# Altium PCB PCB1.PcbDoc (part 1 of 2)
Units mil, origin at the board's own origin, x right, y up, seen from the top; angles counter-clockwise.
Board outline 2954.24 x 1620.63 mil, 4 copper layers (Signal+GND, Signal, PWR, GND), stack 63.303 mil thick; 109 components, 81 nets, 322 pads, 116 vias.
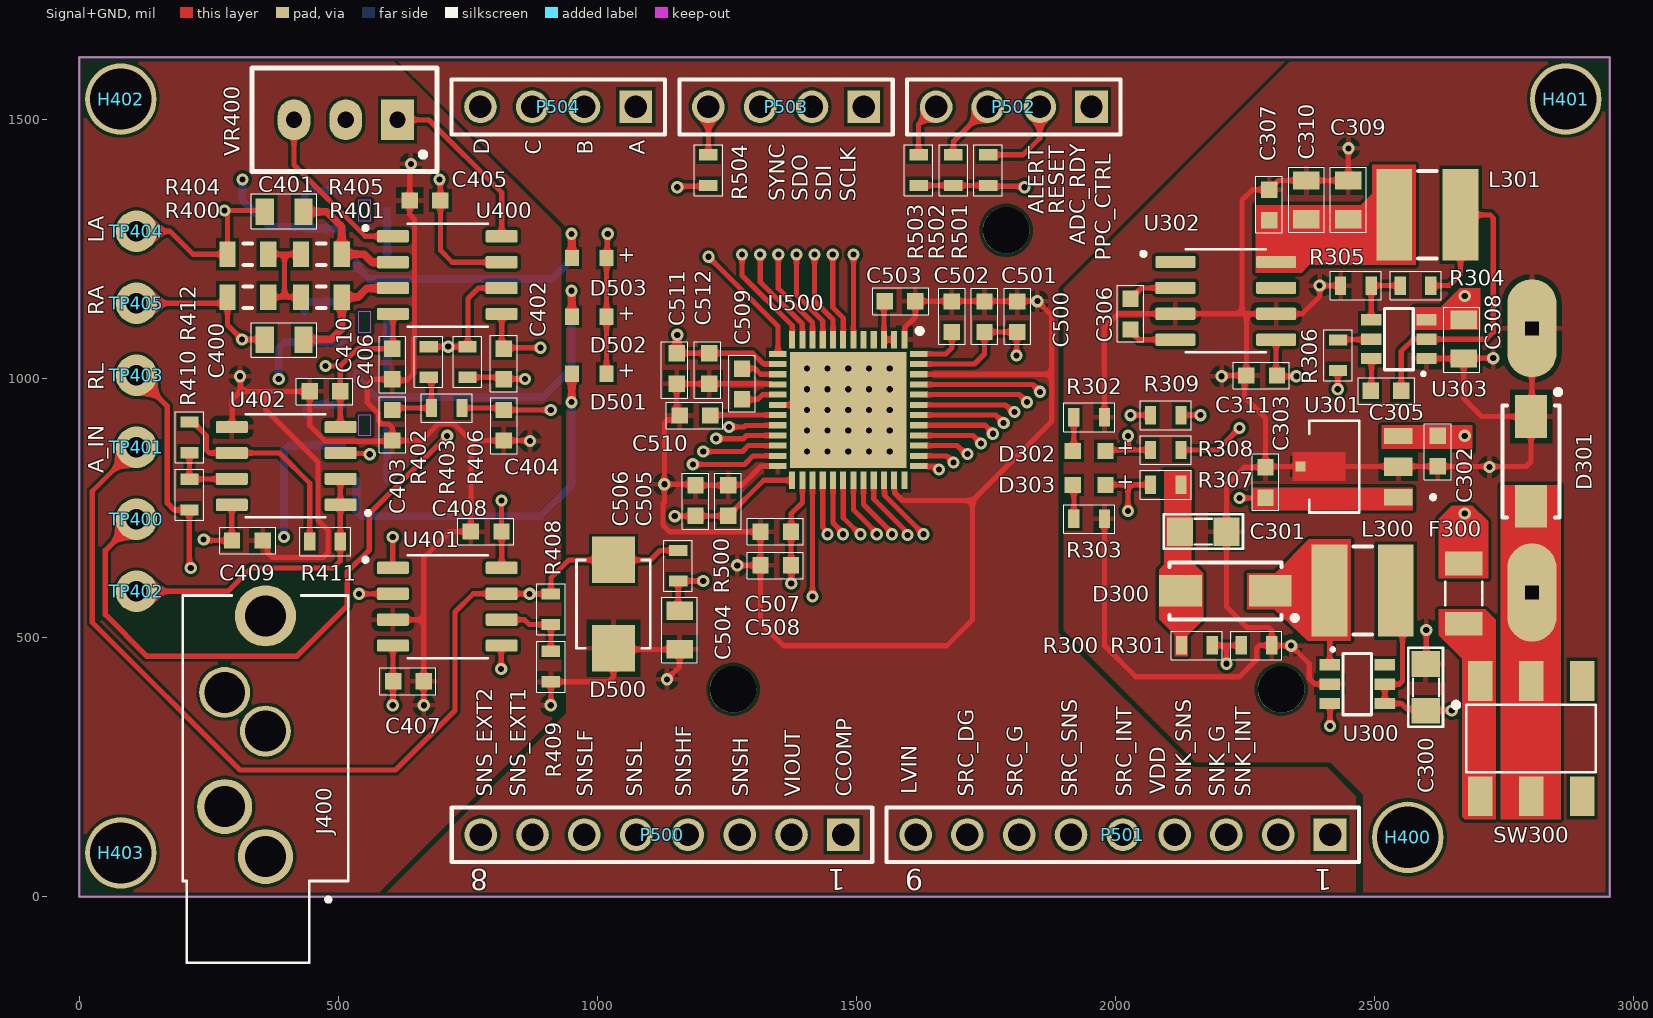
[diagram p0: Signal+GND view]
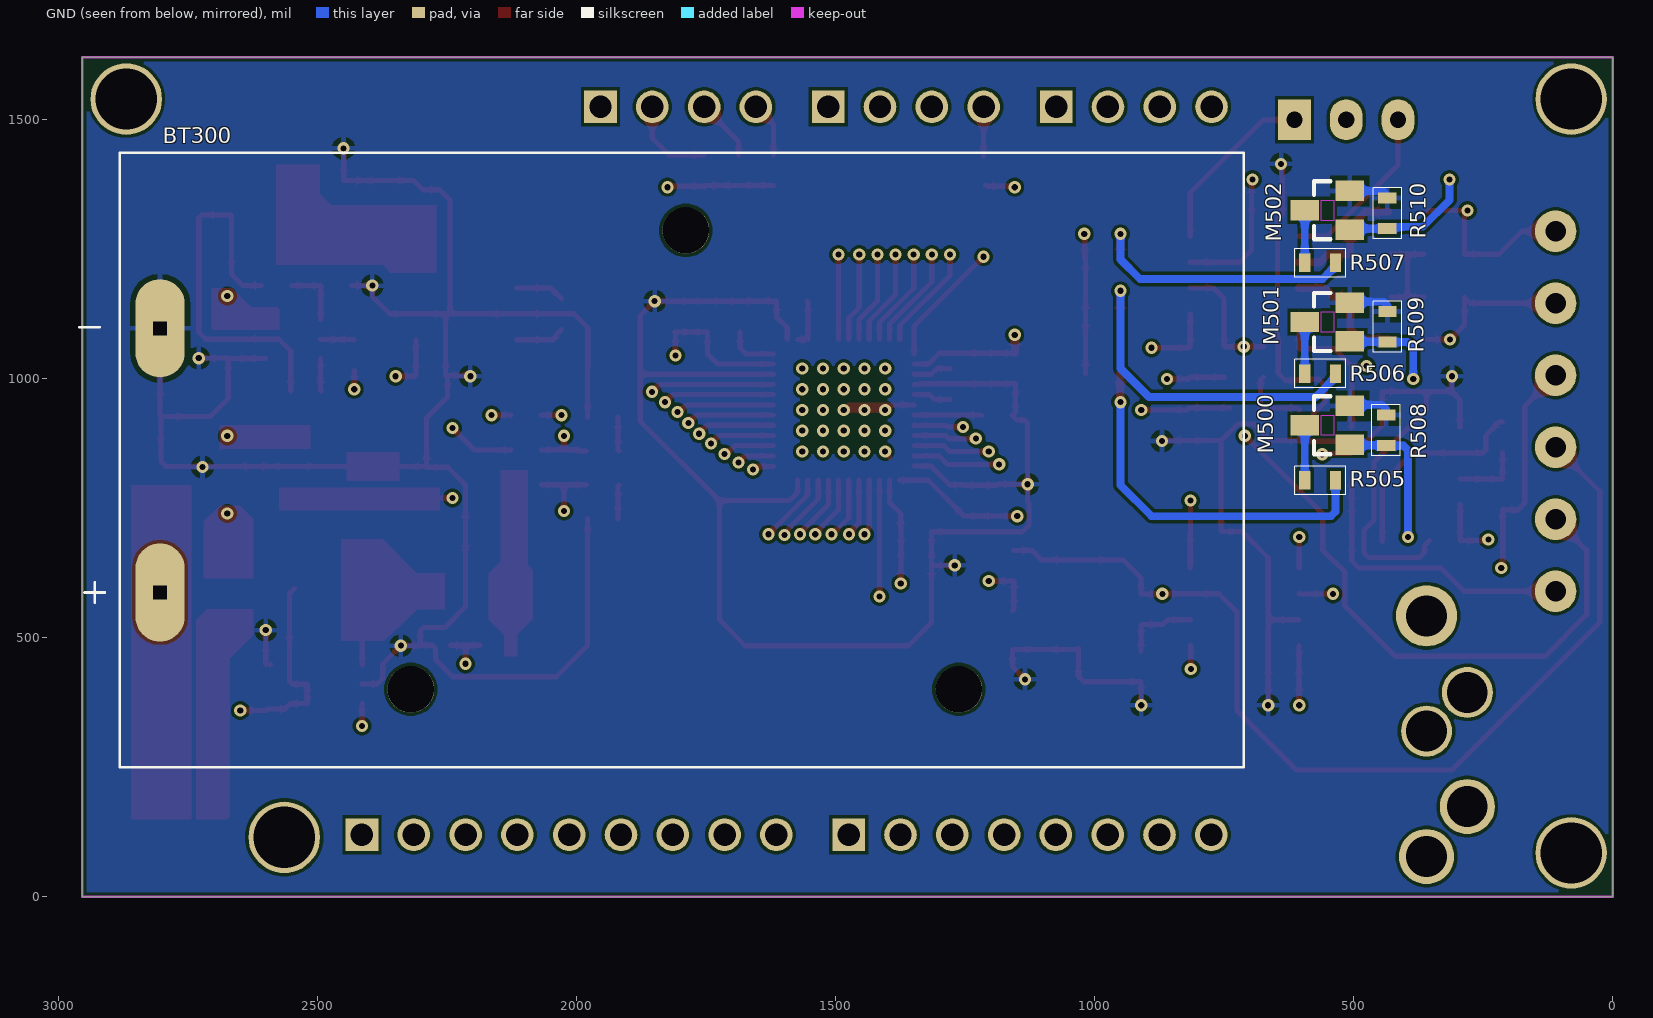
[diagram p1: GND view, seen from below]
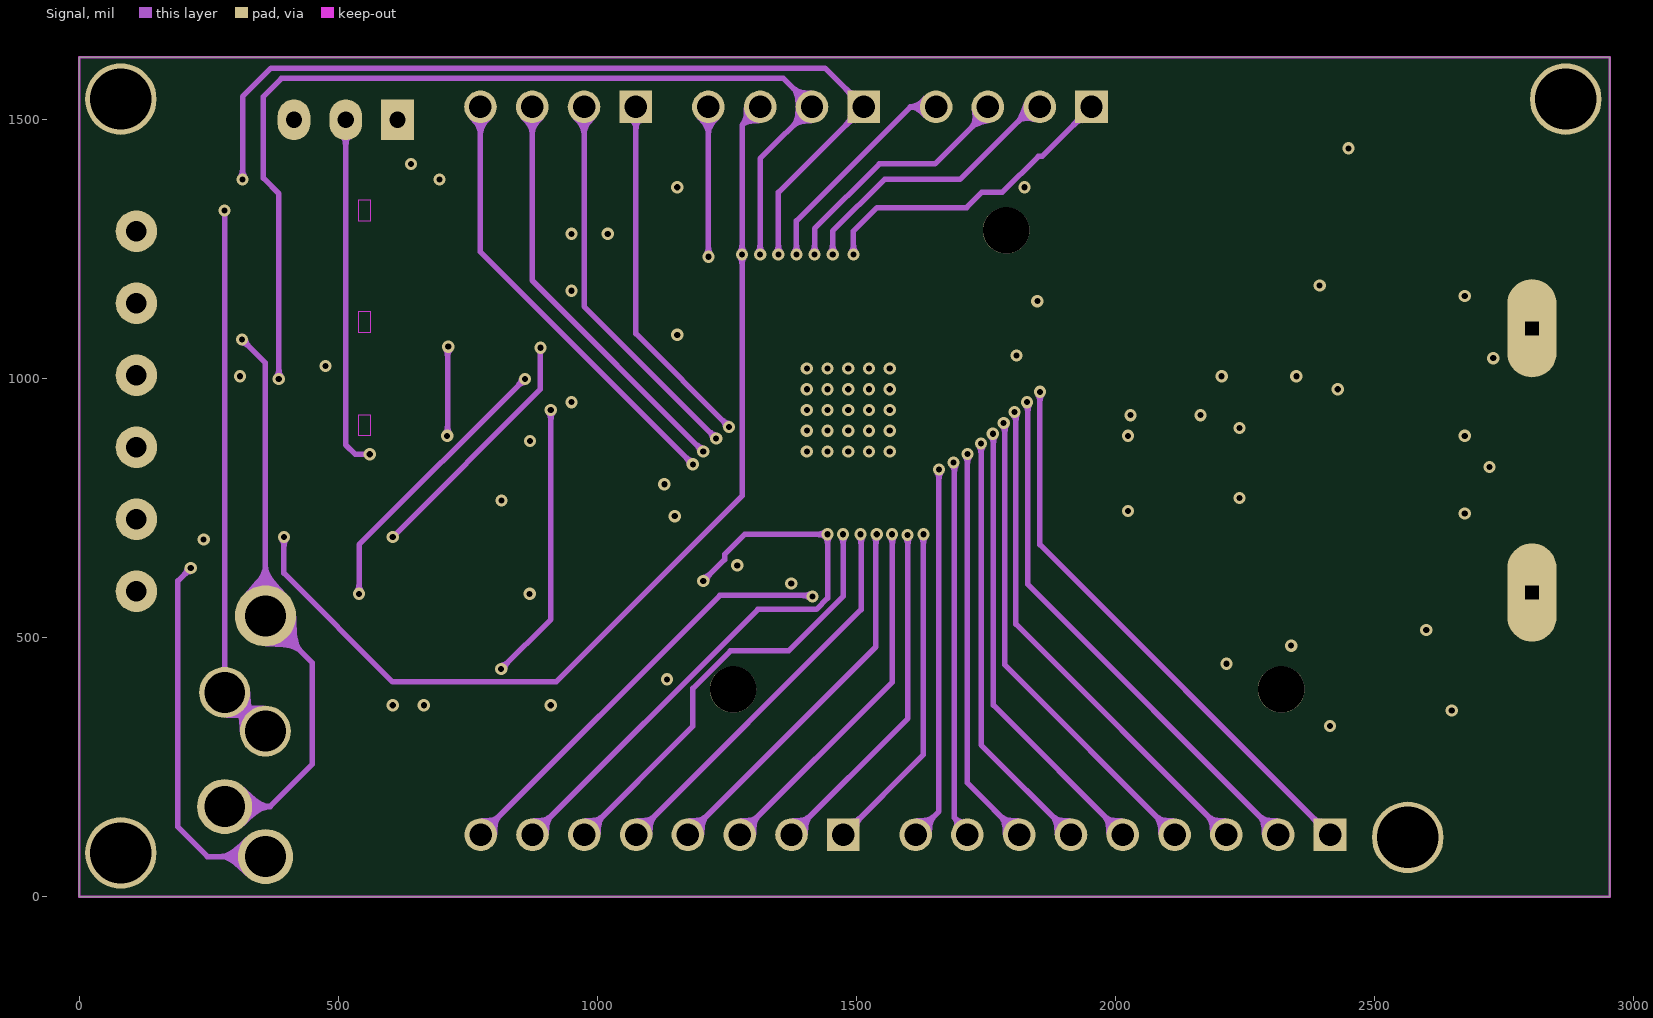
[diagram p2: Signal]
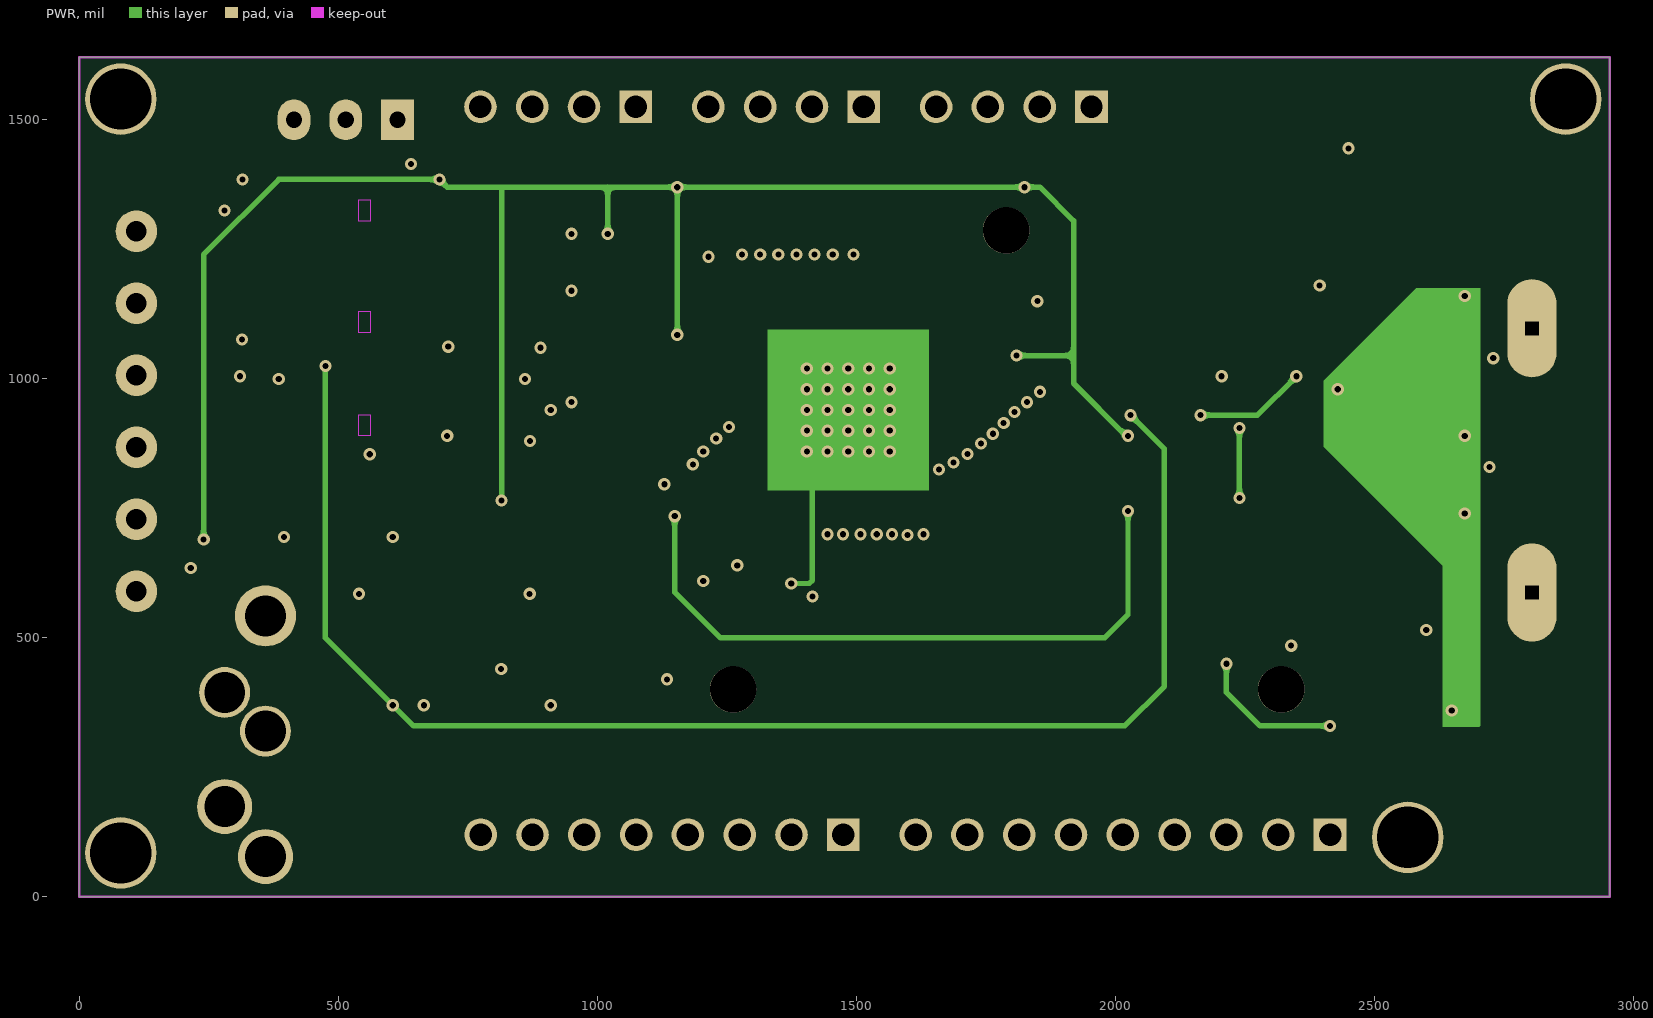
[diagram p3: PWR]
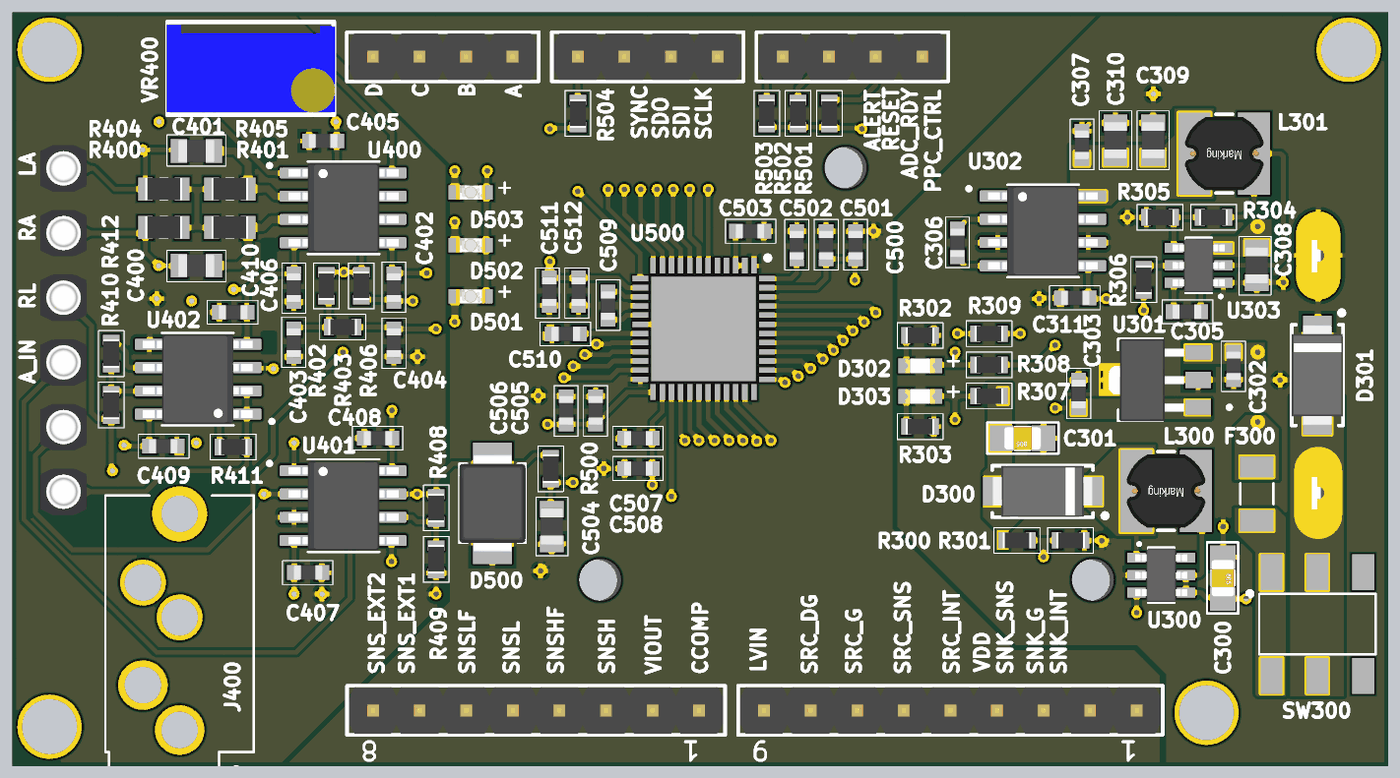
[diagram p5: 3D render of the assembled board from above, using the file's embedded part models]
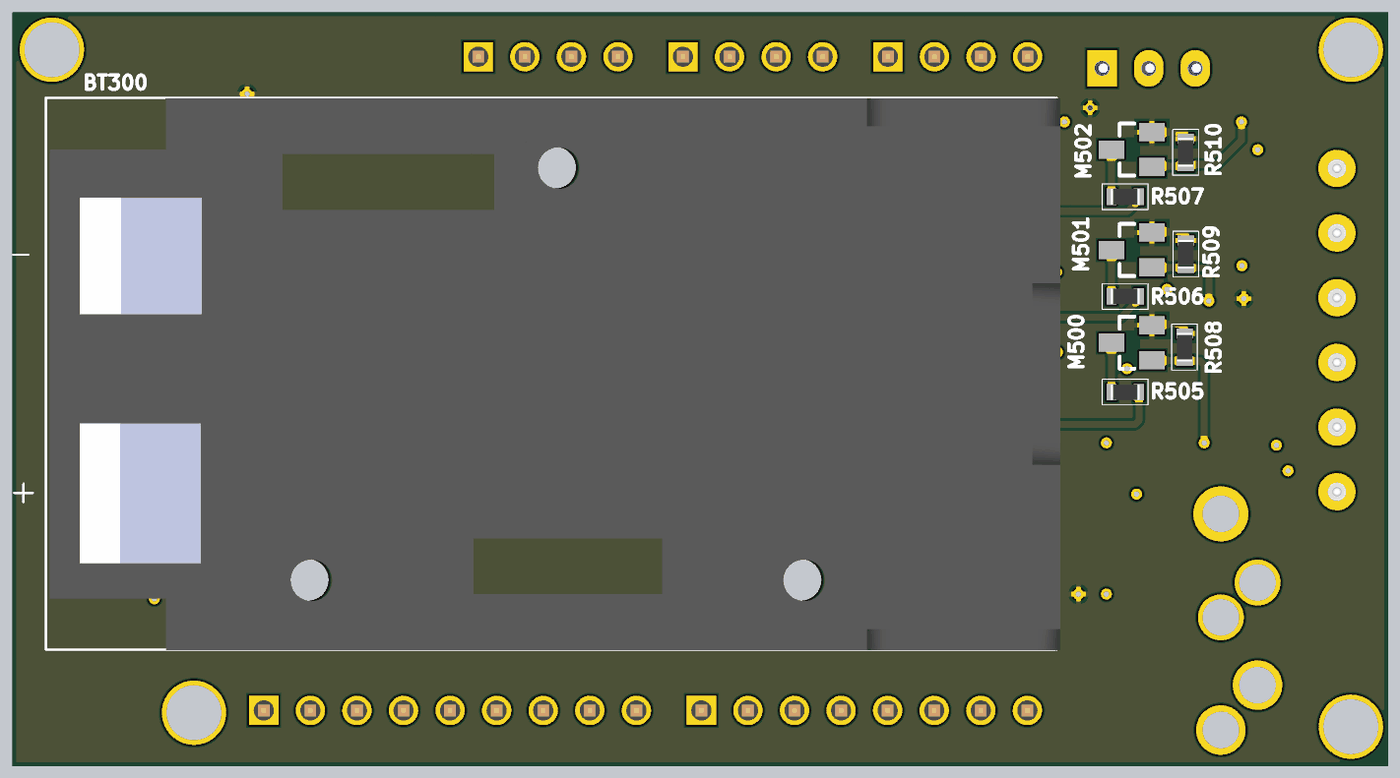
[diagram p6: 3D render of the assembled board from below, using the file's embedded part models]

## Layer stack, top to bottom
Top Solder: solder mask 0.4, Solder Resist, Dk 3.5
Signal+GND: signal copper 1.378
Dielectric 2: prepreg 8.6, PP-023, Dk 4.5
Signal: signal copper 0.709
Dielectric 1: dielectric 41.929, FR-4, Dk 4.8
PWR: signal copper 0.709
Dielectric 3: prepreg 8.6, PP-023, Dk 4.5
GND: signal copper 1.378
Bottom Solder: solder mask 0.4, Solder Resist, Dk 3.5

## Board outline
0,0 0,1620.63 2954.24,1620.63 2954.24,0

## Design rules (kind name [scope] priority, off if disabled: settings)
Clearance [All] p1: gap=6 ignorepadtopadclearanceinfootprint=TRUE
DiffPairsRouting [All] p1: maxlimit=10 minlimit=10 mostfreqgap=10 toplayer_minwidth=15 toplayer_maxwidth=15 toplayer_prefwidth=15 midlayer1_minwidth=15 midlayer1_maxwidth=15 midlayer1_prefwidth=15 midlayer2_minwidth=15 midlayer2_maxwidth=15 midlayer2_prefwidth=15 bottomlayer_minwidth=15 bottomlayer_maxwidth=15 bottomlayer_prefwidth=15 maxuncoupledlength=500
PolygonConnect PolygonConnect_5 [All vs IsNamedPolygon('-5_ADC_L03_P011')] p1: thpad.connectstyle=Relief thpad.reliefconductorwidth=10 thpad.reliefentries=4 thpad.polygonreliefangle="90 Angle" thpad.airgapwidth=10 smdpad.connectstyle=Relief smdpad.reliefconductorwidth=10 smdpad.reliefentries=4 smdpad.polygonreliefangle="90 Angle" smdpad.airgapwidth=10 via.connectstyle=Direct via.reliefconductorwidth=10 via.reliefentries=4 via.polygonreliefangle="90 Angle" via.airgapwidth=10
PolygonConnect PolygonConnect_4 [All vs IsNamedPolygon('VCC_9V_L01_P002')] p2: thpad.connectstyle=Direct thpad.reliefconductorwidth=10 thpad.reliefentries=4 thpad.polygonreliefangle="90 Angle" thpad.airgapwidth=10 smdpad.connectstyle=Direct smdpad.reliefconductorwidth=10 smdpad.reliefentries=4 smdpad.polygonreliefangle="90 Angle" smdpad.airgapwidth=10 via.connectstyle=Relief via.reliefconductorwidth=10 via.reliefentries=4 via.polygonreliefangle="90 Angle" via.airgapwidth=10
PolygonConnect PolygonConnect_3 [All vs IsNamedPolygon('VCC_9V_L01_P002')] p3: thpad.connectstyle=Direct thpad.reliefconductorwidth=10 thpad.reliefentries=4 thpad.polygonreliefangle="90 Angle" thpad.airgapwidth=10 smdpad.connectstyle=Direct smdpad.reliefconductorwidth=10 smdpad.reliefentries=4 smdpad.polygonreliefangle="90 Angle" smdpad.airgapwidth=10 via.connectstyle=Relief via.reliefconductorwidth=10 via.reliefentries=4 via.polygonreliefangle="90 Angle" via.airgapwidth=10
PolygonConnect PolygonConnect_2 [All vs IsNamedPolygon('-5_ADC_L03_P001')] p4: thpad.connectstyle=Direct thpad.reliefconductorwidth=10 thpad.reliefentries=4 thpad.polygonreliefangle="90 Angle" thpad.airgapwidth=10 smdpad.connectstyle=Relief smdpad.reliefconductorwidth=10 smdpad.reliefentries=4 smdpad.polygonreliefangle="90 Angle" smdpad.airgapwidth=10 via.connectstyle=Direct via.reliefconductorwidth=10 via.reliefentries=4 via.polygonreliefangle="90 Angle" via.airgapwidth=10
PolygonConnect PolygonConnect_1 [All vs IsNamedPolygon('-5_ADC_L03_P001')] p5: thpad.connectstyle=Relief thpad.reliefconductorwidth=10 thpad.reliefentries=4 thpad.polygonreliefangle="90 Angle" thpad.airgapwidth=10 smdpad.connectstyle=Relief smdpad.reliefconductorwidth=10 smdpad.reliefentries=4 smdpad.polygonreliefangle="90 Angle" smdpad.airgapwidth=10 via.connectstyle=Direct via.reliefconductorwidth=10 via.reliefentries=4 via.polygonreliefangle="90 Angle" via.airgapwidth=10
PolygonConnect [All] p6: connectstyle=Relief reliefconductorwidth=10 reliefentries=4 polygonreliefangle="90 Angle" airgapwidth=10
RoutingVias [All] p1: holewidth=11.81 width=23.62 viastyle="Through Hole" minholewidth=11.81 minwidth=23.62 maxholewidth=11.81 maxwidth=23.62
SolderMaskExpansion [All] p1: expansion=4 istentingtop=FALSE
Width [All] p1: maxlimit=14.88 minlimit=10 preferedwidth=14.88 midlayer1_minwidth=10.57 midlayer1_maxwidth=10.57 midlayer1_prefwidth=10.57 midlayer2_minwidth=10.57 midlayer2_maxwidth=10.57 midlayer2_prefwidth=10.57 bottomlayer_minwidth=14.88 impedanceprofiledriven=TRUE impedanceprofileid={AA3739DD-8541-4A66-ABEF-EE2A85635770} impedanceprofilevalue=50.000000 minimp=50.000000 maximp=50.000000 favimp=50.000000
29 further rules are at their usual default settings.

## Classes and differential pairs
component class Power_Supply: BT300 C300 C301 C302 C303 C305 C306 C307 C308 C309 C310 C311 D300 D301 D302 D303 F300 L300 L301 R300 R301 R302 R303 R304 R305 R306 R307 R308 R309 SW300 U300 U301 U302 U303
component class ECG_Circuit: C400 C401 C402 C403 C404 C405 C406 C407 C408 C409 C410 H400 H401 H402 H403 J400 R400 R401 R402 R403 R404 R405 R406 R408 R409 R410 R411 R412 TP400 TP401 TP402 TP403 TP404 TP405 U400 U401 U402 VR400
component class ADC: ar C500 C501 C502 C503 C504 C505 C506 C507 C508 C509 C510 C511 C512 D500 D501 D502 D503 M500 M501 M502 P500 P501 P502 P503 P504 R500 R501 R502 R503 R504 R505 R506 R507 R508 R509 R510 U500
differential pair INPUT: +INPUT_P -INPUT_N

## Components (designator, comment, footprint, x,y, rotation, side; value= is the part's Value field where it differs from the comment)
BT300 "BC9VPC" BAT_BC9VPC 1789.01,842.63 r0 bottom value="9V Battery"
C300 "Cap Non-Pol SMD" CAP-SM-0805 2599.24,449.27 r270 top value=22uF/16V/0805
C301 "Cap Non-Pol SMD" CAP-SM-0805 2214.24,705 r180 top value=22uF/16V/0805
C302 "330nF, 50V" WCAP-CSGP_0603_H=0.8mm_Reflow 2622.27,860.63 r90 top value=330nF/50V/0603
C303 "100nF, 25V" WCAP-CSGP_0603_H=0.8mm_Reflow 2289.7,800 r90 top value=100nF/50V/0603
C305 "1uF, 16V" WCAP-CSGP_0603_H=0.8mm_Reflow 2522.29,977.04 r0 top value=1uF/16v/0603
C306 "10uF, 6.3V" WCAP-CSGP_0603_H=0.8mm_Reflow 2029.24,1125 r90 top value=10uF/25V/0603
C307 "100nF, 25V" WCAP-CSGP_0603_H=0.8mm_Reflow 2296.65,1335.63 r90 top value=100nF/50V/0603
C308 "22uF, 10V" WCAP-CSGP_0805_H=1.25mm 2672.27,1076.62 r90 top value=22uF/16V/0805
C309 "22uF, 10V" WCAP-CSGP_0805_H=1.25mm 2449.55,1345.63 r270 top value=22uF/16V/0805
C310 "22uF, 10V" WCAP-CSGP_0805_H=1.25mm 2368.67,1345.63 r270 top value=22uF/16V/0805
C311 "10uF, 6.3V" WCAP-CSGP_0603_H=0.8mm_Reflow 2282.27,1006.66 r0 top value=10uF/25V/0603
C400 "3.3uF, 25V" WCAP-CSGP_0805_H=1.25mm 395.22,1075.96 r0 top value=3.3uF/25V/0603
C401 "3.3uF, 25V" WCAP-CSGP_0805_H=1.25mm 395.22,1322.53 r0 top value=3.3uF/25V/0603
C402 "2.2uF, 16V" WCAP-CSGP_0603_H=0.8mm_Reflow 819.24,1028.67 r90 top
C403 "1uF, 16V" WCAP-CSGP_0603_H=0.8mm_Reflow 604.24,910.39 r90 top value=1uF/16V/0603
C404 "1uF, 16V" WCAP-CSGP_0603_H=0.8mm_Reflow 819.24,910.39 r90 top value=1uF/16V/0603
C405 "100nF, 25V" WCAP-CSGP_0603_H=0.8mm_Reflow 667.31,1344.16 r0 top value=100nF/50V/0603
C406 "100nF, 25V" WCAP-CSGP_0603_H=0.8mm_Reflow 604.24,1028.67 r270 top value=100nF/50V/0603
C407 "100nF, 25V" WCAP-CSGP_0603_H=0.8mm_Reflow 635.24,416.23 r180 top value=100nF/50V/0603
C408 "100nF, 25V" WCAP-CSGP_0603_H=0.8mm_Reflow 785.24,705.2 r180 top value=100nF/50V/0603
C409 "100nF, 25V" WCAP-CSGP_0603_H=0.8mm_Reflow 324.24,687.98 r180 top value=100nF/50V/0603
C410 "100nF, 25V" WCAP-CSGP_0603_H=0.8mm_Reflow 474.24,975.92 r180 top value=100nF/50V/0603
C500 "10uF, 6.3V" WCAP-CSGP_0603_H=0.8mm_Reflow 1810.56,1120 r270 top value=10uF/16V/0603
C501 "100nF, 50V" WCAP-CSGP_0603_H=0.8mm_Reflow 1747.4,1120 r270 top
C502 "2.2uF, 16V" WCAP-CSGP_0603_H=0.8mm_Reflow 1684.24,1120 r270 top value=2.2uF/16V/0603
C503 "22nF, 50V" WCAP-CSGP_0603_H=0.8mm_Reflow 1584.24,1150 r0 top
C504 "4.7nF, 100V" WCAP-CSGP_0805_H=1.25mm 1158.63,515.2 r90 top
C505 "100nF, 50V" WCAP-CSGP_0603_H=0.8mm_Reflow 1252.4,765 r270 top
C506 "10uF, 6.3V" WCAP-CSGP_0603_H=0.8mm_Reflow 1189.24,765 r270 top value=10uF/16V/0603
C507 "100nF, 50V" WCAP-CSGP_0603_H=0.8mm_Reflow 1344.24,705 r0 top
C508 "10uF, 6.3V" WCAP-CSGP_0603_H=0.8mm_Reflow 1344.24,640 r0 top value=10uF/16V/0603
C509 "330nF, 50V" WCAP-CSGP_0603_H=0.8mm_Reflow 1279.24,990 r90 top value=330nF/50V/0603
C510 "2.2uF, 16V" WCAP-CSGP_0603_H=0.8mm_Reflow 1188.52,929.28 r0 top value=2.2uF/16V/0603
C511 "10uF, 6.3V" WCAP-CSGP_0603_H=0.8mm_Reflow 1152.92,1020 r90 top value=10uF/16V/0603
C512 "100nF, 50V" WCAP-CSGP_0603_H=0.8mm_Reflow 1216.08,1020 r90 top
D300 "D Schottky" SS34 2212.27,590.63 r180 top
D301 "D Schottky" SS34 2802.27,840.63 r270 top
D302 "Blue, 3.2V" WL-SMCW_0603_H=0.7mm 1949.37,860.77 r0 top
D303 "Red, 2V" WL-SMCW_0603_H=0.7mm 1949.37,795 r0 top
D500 "SMBJ36CA" DIOM4336X265N 1031,565.2 r270 top
D501 "Blue, 3.2V" "WL-SMCW_0603 dome" 984.24,1010 r0 top
D502 "Green, 3.3V" "WL-SMCW_0603 dome" 984.24,1120 r0 top
D503 "Red, 2V" "WL-SMCW_0603 dome" 984.24,1233.16 r0 top
F300 "RESETTABLE FUSE 1206" FUSE1206 2672.27,585.63 r90 top value="Resettable Fuse 6V 0.35A"
H400 "Hole" "LO KHOAN 3MM" 2564.24,115 r0 top
H401 "Hole" "LO KHOAN 3MM" 2869.24,1540 r0 top
H402 "Hole" "LO KHOAN 3MM" 80,1540 r0 top
H403 "Hole" "LO KHOAN 3MM" 80,85 r0 top
J400 "PJ-324" "3.5 mm, Strereo" 359.24,77.87 r90 top value=PJ-325
L300 "4.7uH, 1.82A" WE-PD2A_4532 2477.27,591.37 r180 top
L301 "10uH, 1.45A" WE-PD2A_4532 2602.27,1316.62 r180 top
M500 "SI2302" SOT23 550.63,910.4 r90 bottom value=SI2302DS
M501 "SI2302" SOT23 550.63,1109.71 r90 bottom value=SI2302DS
M502 "SI2302" SOT23 550.63,1325.4 r90 bottom value=SI2302DS
P500 "61300811121" 61300811121 1124.7,120 r180 top
P501 "61300911121" 61300911121 2014.24,120 r180 top
P502 "61300411121" 61300411121 1803.78,1525 r180 top
P503 "61300411121" 61300411121 1364.24,1525 r180 top
P504 "61300411121" 61300411121 924.24,1525 r180 top
R300 "Resistor 44.2 KOhm 0603 1%" R0603 2157.27,485.63 r180 top value="44.2 KOhm/0603/1%"
R301 "Resistor 2.32 KOhm 0603 1%" R0603 2272.27,485.63 r180 top value="2.32 KOhm/0603/1%"
R302 "Resistor 470 Ohm 0603 1%" R0603 1949.24,925.92 r180 top value="470 Ohm/0603/1%"
R303 "Resistor 1 KOhm 0603 1%" R0603 1949.24,729.86 r180 top value="1 KOhm/0603/1%"
R304 "Resistor 100 KOhm 0603 1%" R0603 2579.24,1180 r0 top value="100 KOhm/0603/1%"
R305 "Resistor 15 KOhm 0603 1%" R0603 2464.24,1180 r0 top value="15 KOhm/0603/1%"
R306 "Resistor 200 KOhm 0603 5%" R0603 2429.59,1045.63 r270 top value="200 KOhm/0603/1%"
R307 "Resistor 0 Ohm 0603 5%" R0603 2097.27,795.63 r180 top value="0 Ohm/0603/5%"
R308 "Resistor 0 Ohm 0603 5%" R0603 2097.27,862.73 r180 top value="0 Ohm/0603/5%"
R309 "Resistor 0 Ohm 0603 5%" R0603 2097.27,929.82 r180 top value="0 Ohm/0603/5%"
R400 "Resistor 4.7 MOhm 0805 5%" R0805 325.22,1157.82 r180 top value="4.7 MOhm/0805/5%"
R401 "Resistor 4.7 MOhm 0805 5%" R0805 467.12,1157.82 r0 top value="4.7 MOhm/0805/5%"
R402 "Resistor 1 KOhm 0603 1%" R0603 674.24,1032.59 r270 top value="1 KOhm/0603/1%"
R403 "Resistor 1 KOhm 0603 1%" R0603 709.24,943.81 r0 top value="1 KOhm/0603/1%"
R404 "Resistor 4.7 MOhm 0805 5%" R0805 325.22,1240.67 r0 top value="4.7 MOhm/0805/5%"
R405 "Resistor 4.7 MOhm 0805 5%" R0805 467.12,1240.67 r180 top value="4.7 MOhm/0805/5%"
R406 "Resistor 750 KOhm 0603 5%" R0603 749.24,1032.59 r90 top value="750 KOhm/0603/5%"
R408 "Resistor 300 KOhm 0603 5%" R0603 910.24,555.2 r90 top value="300 KOhm/0603/5%"
R409 "Resistor 10 KOhm 0603 1%" R0603 910.24,444.76 r90 top value="10 KOhm/0603/1%"
R410 "Resistor 10 KOhm 0603 1%" R0603 212.51,776.51 r90 top value="10 KOhm/0603/1%"
R411 "Resistor 10 KOhm 0603 1%" R0603 474.24,686 r0 top value="10 KOhm/0603/1%"
R412 "Resistor 1 MOhm 0603 1%" R0603 212.51,886.95 r90 top value="1 MOhm/0603/1%"
R500 "Resistor 2.7 KOhm 0603 5%" R0603 1156,639.4 r90 top value="2.7 KOhm/0603/5%"
R501 "Resistor 100 KOhm 0603 1%" R0603 1754.24,1402.97 r270 top value="100 KOhm/0603/1%"
R502 "Resistor 100 KOhm 0603 1%" R0603 1687.11,1402.97 r270 top value="100 KOhm/0603/1%"
R503 "Resistor 100 KOhm 0603 1%" R0603 1619.99,1402.97 r270 top value="100 KOhm/0603/1%"
R504 "Resistor 100 KOhm 0603 1%" R0603 1214.24,1402.97 r90 top value="100 KOhm/0603/1%"
R505 "Resistor 1 KOhm 0603 1%" R0603 564.63,804.09 r180 bottom value="1 KOhm/0603/1%"
R506 "Resistor 1 KOhm 0603 1%" R0603 564.63,1010.05 r180 bottom value="1 KOhm/0603/1%"
R507 "Resistor 1 KOhm 0603 1%" R0603 564.63,1224.09 r180 bottom value="1 KOhm/0603/1%"
R508 "Resistor 10 KOhm 0603 1%" R0603 437.2,900.74 r270 bottom value="10 KOhm/0603/1%"
R509 "Resistor 10 KOhm 0603 1%" R0603 434.59,1100.57 r270 bottom value="10 KOhm/0603/1%"
R510 "Resistor 10 KOhm 0603 1%" R0603 435,1319.53 r270 bottom value="10 KOhm/0603/1%"
SW300 "Slide Switch" MSS-22D18G2 2802.27,305.63 r0 top value=MSS-22D18G2
TP400 "Test Point" TP 110,729 r270 top
TP401 "Test Point" TP 110,868 r270 top
TP402 "Test Point" TP 110,590 r270 top
TP403 "Test Point" TP 110,1007 r90 top
TP404 "Test Point" TP 110,1285 r90 top
TP405 "Test Point" TP 110,1146 r90 top
U300 "SX1308" SOT-23-6 2466.83,410.63 r0 top value=SX1380
U301 "78L05" SOT-89 2422.27,830.63 r90 top value=LM78L05
U302 "ICL7662EBA+" SOIC-8#1 2212.97,1150.63 r0 top value=ICL7662
U303 "MT1470" SOT-23-6 2547.27,1076.62 r180 top
U400 "INA129" SOIC-8#2 710.24,1200.2 r0 top
U401 "OPA2227" SOIC-8#2 710.24,560.2 r0 top
U402 "OPA2227" SOIC-8#2 399.24,831.95 r180 top
U500 "AD74115BCPZ" QFN50P700X700X80-49N-D 1484.27,940 r270 top
VR400 "10K" "VARISTOR 2" 514.24,1500 r180 top value="VR 10K"

## Footprints (in the part's own frame and the unit in brackets; to place one, negate y for a bottom-side part, rotate by r counter-clockwise, add the part's x,y. Pads: shape width x height; smd on the part's side, far side on the other; paste and mask are expansions set on the pad)
"3.5 mm, Strereo" [mm]
  round 2.7 hole 2: 1(0,0) 2(2.45,2)
  round 2.5 hole 2: 3(6.15,0) 4(8.05,2)
  round 3 hole 2: 5(11.8,0)
  silkscreen extent -5.2,-4.05 12.8,4.05
61300411121 [mm] "Pin Header, pitch 2.54 mm, THT, Vertical, single row, 4p"
  rect 1.6x1.6 hole 1.1: 1(-3.81,0)
  round 1.6 hole 1.1: 2(-1.27,0) 3(1.27,0) 4(3.81,0)
  silkscreen extent -5.23,-1.35 5.23,1.35, body extent -5.08,-1.27 5.08,1.27, height 8.57
61300811121 [mm] "Pin Header, pitch 2.54 mm, THT, Vertical, single row, 8p"
  rect 1.6x1.6 hole 1.1: 1(-8.89,0)
  round 1.6 hole 1.1: 2(-6.35,0) 3(-3.81,0) 4(-1.27,0) 5(1.27,0) 6(3.81,0) 7(6.35,0) 8(8.89,0)
  silkscreen extent -10.31,-1.35 10.31,1.35, body extent -10.16,-1.27 10.16,1.27, height 8.57
61300911121 [mm] "Pin Header, pitch 2.54 mm, THT, Vertical, single row, 9p"
  rect 1.6x1.6 hole 1.1: 1(-10.16,0)
  round 1.6 hole 1.1: 2(-7.62,0) 3(-5.08,0) 4(-2.54,0) 5(0,0) 6(2.54,0) 7(5.08,0) 8(7.62,0) 9(10.16,0)
  silkscreen extent -11.58,-1.35 11.58,1.35, body extent -11.43,-1.27 11.43,1.27, height 8.57
BAT_BC9VPC [mil]
  oval 94.88x189.76 hole 26 square: N(1015,-255) P(1015,255)
  round 90 hole 90 unplated: ""(-527,442) ""(0,-444) ""(531,442)
  silkscreen extent -1077,-594 1171,592, body extent -1085,-593 1085,593, height 845
CAP-SM-0805 [mil]
  rect 50x55 smd: 1(0,0) 2(90,0)
  silkscreen extent -32,-34 121,33, body extent 6,-25 84,25, height 31
DIOM4336X265N [mm]
  rect 2.28x2.12 smd: 1(-2.165,0) 2(2.165,0)
  silkscreen extent -2.16,-1.81 2.16,1.81, body extent -2.68,-1.81 2.68,1.81, height 2.65
FUSE1206 [mm]
  rect 1.16x1.82 smd: 1(-1.475,0) 2(1.475,0)
  silkscreen extent -0.57,-0.9 0.57,0.9
"LO KHOAN 3MM" [mil]
  round 138 hole 118.1: 1(0,0)
MSS-22D18G2 [mm] "3.5x9.1mm Slide Switches ROHS"
  rect 1.2x1.95 smd: 1(-2.5,2.825) 2(0,2.825) 3(2.5,2.825) 4(-2.5,-2.825) 5(0,-2.825) 6(2.5,-2.825)
  silkscreen extent -3.81,-1.65 3.17,1.78
QFN50P700X700X80-49N-D [mm]
  rect 0.85x0.3 smd: 1(-3.45,2.75) 2(-3.45,2.25) 3(-3.45,1.75) 4(-3.45,1.25) 5(-3.45,0.75) 6(-3.45,0.25) 7(-3.45,-0.25) 8(-3.45,-0.75) 9(-3.45,-1.25) 10(-3.45,-1.75) 11(-3.45,-2.25) 12(-3.45,-2.75) 25(3.45,-2.75) 26(3.45,-2.25) 27(3.45,-1.75) 28(3.45,-1.25) 29(3.45,-0.75) 30(3.45,-0.25) 31(3.45,0.25) 32(3.45,0.75) 33(3.45,1.25) 34(3.45,1.75) 35(3.45,2.25) 36(3.45,2.75)
  rect 0.3x0.85 smd: 13(-2.75,-3.45) 14(-2.25,-3.45) 15(-1.75,-3.45) 16(-1.25,-3.45) 17(-0.75,-3.45) 18(-0.25,-3.45) 19(0.25,-3.45) 20(0.75,-3.45) 21(1.25,-3.45) 22(1.75,-3.45) 23(2.25,-3.45) 24(2.75,-3.45) 37(2.75,3.45) 38(2.25,3.45) 39(1.75,3.45) 40(1.25,3.45) 41(0.75,3.45) 42(0.25,3.45) 43(-0.25,3.45) 44(-0.75,3.45) 45(-1.25,3.45) 46(-1.75,3.45) 47(-2.25,3.45) 48(-2.75,3.45)
  rect 5.7x5.7 smd: 49(0,0)
  silkscreen extent -4,3.38 -3.75,3.63
R0603 [mm]
  rect 0.55x0.9 smd: 1(-0.75,0) 2(0.75,0)
  silkscreen extent -1.25,-0.7 1.25,0.7, body extent -0.77,-0.43 0.77,0.43, height 0.45
R0805 [mm]
  rect 0.8x1.25 smd: 1(-1,0) 2(1,0)
  silkscreen extent -0.2,-0.53 0.2,0.53, body extent -1,-0.6 1,0.6, height 0.45
SOIC-8#1 [mm]
  rrect25% 1.97x0.6 smd: 1(-2.47,1.905) 2(-2.47,0.635) 3(-2.47,-0.635) 4(-2.47,-1.905) 5(2.47,-1.905) 6(2.47,-0.635) 7(2.47,0.635) 8(2.47,1.905)
  silkscreen extent -4.14,-2.52 1.95,2.52, body extent -3,-2.45 3,2.45, height 1.75
SOIC-8#2 [mm]
  rrect25% 1.57x0.6 smd: 1(-2.667,1.905) 2(-2.667,0.635) 3(-2.667,-0.635) 4(-2.667,-1.905) 5(2.667,-1.905) 6(2.667,-0.635) 7(2.667,0.635) 8(2.667,1.905)
  silkscreen extent -4.11,-2.52 1.98,2.52, body extent -2.97,-2.45 3.02,2.45, height 1.75
SOT23 [mm]
  rect 1x1.4 smd: 1(-0.95,-1.1) 2(0.95,-1.1) 3(0,1.1)
  Keep-Out Layer region: 0.5,-0.3 -0.5,-0.3 -0.5,0.3 0.5,0.3
  silkscreen extent -1.42,-0.15 1.42,0.66
SOT-23-6 [mm]
  rect 1x0.55 smd: 1(-1.35,0.95) 2(-1.35,0) 3(-1.35,-0.95) 4(1.35,-0.95) 5(1.35,0) 6(1.35,0.95)
  silkscreen extent -1.29,-1.5 0.7,1.79, body extent -1.42,-1.46 1.42,1.46, height 1.05
SOT-89 [mm]
  rect 0.8x1.4 smd: 1(-1.5,-3.15) 3(1.5,-3.15)
  rect 0.9x1.4 smd: 2(0,-3.15)
  rect 0.5x0.5 smd paste-1 mask+0: 4(0,1.65)
  Signal+GND region: 0.7,2.032 0.7,-0.55 -0.7,-0.55 -0.7,2.032
  silkscreen extent -2.25,-4.95 2.25,1.22, body extent -2.26,-2.38 2.24,1.72, height 1.6
SS34 [mm] "DO-214-AC/SMA Molded Diode, Body 5.3x2.6mm, IPC Medium Density"
  rect 2.1x1.55 smd: 1(-2.2,0) 2(2.2,0)
  silkscreen extent -3.53,-1.4 2.75,1.45, body extent -2.75,-1.4 2.75,1.4, height 2.3
TP [mil] "Connect 1"
  round 80 hole 39: TP1(0,0)
  body extent -50,-50 50,50, height 179
"VARISTOR 2" [mm] "Resistor Variable"
  rect 1.6x2 hole 0.8: 1(-2.54,0)
  oval 1.6x2 hole 0.8: 2(0,0) 3(2.54,0)
  silkscreen extent -4.47,-2.54 4.6,2.54, body extent -4.54,-2.4 4.66,2.4, height 12.02
WCAP-CSGP_0603_H=0.8mm_Reflow [mm] "Ceramic Capacitors, body 1.6x0.8mm"
  rect 0.8x0.8 smd: 1(-0.75,0) 2(0.75,0)
  body extent -0.8,-0.4 0.8,0.4, height 0.8
WCAP-CSGP_0805_H=1.25mm [mm] "Ceramic Capacitors, body 2x1.25mm"
  rect 0.9x1.3 smd: 1(-0.95,0) 2(0.95,0)
  body extent -1,-0.62 1,0.63, height 1.25
WE-PD2A_4532 [mm] "SMD Power Inductor, body 4.5x4mm"
  rect 1.75x4.5 smd: 1(-1.625,0) 2(1.625,0)
  silkscreen extent -0.45,-2.15 0.45,2.15, body extent -2.16,-2 2.16,2, height 3.2
"WL-SMCW_0603 dome" [mm] "SMD Mono-color Chip LED, body 1.6x0.8mm"
  rect 0.7x0.8 smd: 1(-0.85,0) 2(0.85,0)
  body extent -0.8,-0.4 0.8,0.4, height 0.95
WL-SMCW_0603_H=0.7mm [mm] "SMD Mono-color Chip LED, body 1.6x0.8mm"
  rect 0.8x0.8 smd: 1(-0.8,0) 2(0.8,0)
  body extent -0.8,-0.4 0.8,0.4, height 0.7

## Part data
BT300: "Battery Holder 1 Cells 9V Size Plastic Tray", Package=None, Check_prices=https://www.snapeda.com/parts/BC9VPC/Memory+Protection+Devices/view-part/?ref=eda, MF="MPD (Memory Protection Devices)", MP=BC9VPC, SnapEDA_Link=https://www.snapeda.com/parts/BC9VPC/Memory+Protection+Devices/view-part/?ref=snap
C300 C301: "Capacitor"
C302 C509: library part 885012206121, "WCAP-CSGP Multilayer Ceramic Chip Capacitor, General Purpose, size 0603, X7R, 330nF, 50V", Capacitance Tolerance=+/-10%, Isolation Resistance=>=1.5GOhm, Manufacturer="Wurth Elektronik", Operating Temperature="-55 to +125degC", Rated Voltage=50VDC, Ceramic Type=X7R, ComponentLink1Description=Manufacturer, ComponentLink1URL=http://www.we-online.de, ComponentLink2Description=Datasheet, ComponentLink2URL=https://www.we-online.com/catalog/datasheet/885012206121.pdf, Dissipation Factor=#NAME?, Height=0.8mm, Manufacturer Part Number=885012206121, Mounting Technology=SMT, Packaging="Tape and Reel", Published Date="May 2020", Size=0603, Technical Reference=X7R0603334K050DFCT10000
C303 C307 C405 C406 C407 C408 C409 C410: library part 885012206071, "WCAP-CSGP Multilayer Ceramic Chip Capacitor, General Purpose, size 0603, X7R, 100nF, 25V", Capacitance Tolerance=+/-10%, Isolation Resistance=>=5GOhm, Manufacturer="Wurth Elektronik", Operating Temperature="-55 to +125degC", Rated Voltage=25VDC, Ceramic Type=X7R, ComponentLink1Description=Manufacturer, ComponentLink1URL=http://www.we-online.de, ComponentLink2Description=Datasheet, ComponentLink2URL=https://www.we-online.com/catalog/datasheet/885012206071.pdf, Dissipation Factor=#NAME?, Height=0.8mm, Manufacturer Part Number=885012206071, Mounting Technology=SMT, Packaging="Tape and Reel", Published Date="May 2020", Size=0603, Technical Reference=X7R0603104K025DFCT10000
C305 C403 C404: library part 885012106017, "WCAP-CSGP Multilayer Ceramic Chip Capacitor, General Purpose, size 0603, X5R, 1uF, 16V", Capacitance Tolerance=+/-20%, Isolation Resistance=>=0.1GOhm, Manufacturer="Wurth Elektronik", Operating Temperature="-55 to +85degC", Rated Voltage=16VDC, Ceramic Type=X5R, ComponentLink1Description=Manufacturer, ComponentLink1URL=http://www.we-online.de, ComponentLink2Description=Datasheet, ComponentLink2URL=https://www.we-online.com/catalog/datasheet/885012106017.pdf, Dissipation Factor=#NAME?, Height=0.8mm, Manufacturer Part Number=885012106017, Mounting Technology=SMT, Packaging="Tape and Reel", Published Date="May 2020", Size=0603, Technical Reference=X5R0603105M016DFCT10000
C306 C311 C500 C506 C508 C511: library part 885012106006, "WCAP-CSGP Multilayer Ceramic Chip Capacitor, General Purpose, size 0603, X5R, 10uF, 6.3V", Capacitance Tolerance=+/-20%, Isolation Resistance=>=0.01GOhm, Manufacturer="Wurth Elektronik", Operating Temperature="-55 to +85degC", Rated Voltage=6.3VDC, Ceramic Type=X5R, ComponentLink1Description=Manufacturer, ComponentLink1URL=http://www.we-online.de, ComponentLink2Description=Datasheet, ComponentLink2URL=https://www.we-online.com/catalog/datasheet/885012106006.pdf, Dissipation Factor=#NAME?, Height=0.8mm, Manufacturer Part Number=885012106006, Mounting Technology=SMT, Packaging="Tape and Reel", Published Date="May 2020", Size=0603, Technical Reference=X5R0603106M6R3DFCT10000
C308 C309 C310: library part 885012107011, "WCAP-CSGP Multilayer Ceramic Chip Capacitor, General Purpose, size 0805, X5R, 22uF, 10V", Capacitance Tolerance=+/-20%, Isolation Resistance=>=0.005GOhm, Manufacturer="Wurth Elektronik", Operating Temperature="-55 to +85degC", Rated Voltage=10VDC, Ceramic Type=X5R, ComponentLink1Description=Manufacturer, ComponentLink1URL=http://www.we-online.de, ComponentLink2Description=Datasheet, ComponentLink2URL=https://www.we-online.com/catalog/datasheet/885012107011.pdf, Dissipation Factor=#NAME?, Height=1.25mm, Manufacturer Part Number=885012107011, Mounting Technology=SMT, Packaging="Tape and Reel", Published Date="May 2020", Size=0805, Technical Reference=X5R0805226M010DFCT10000
C400 C401: library part 885012107017, "WCAP-CSGP Multilayer Ceramic Chip Capacitor, General Purpose, size 0805, X5R, 3.3uF, 25V", Capacitance Tolerance=+/-20%, Isolation Resistance=>=0.03GOhm, Manufacturer="Wurth Elektronik", Operating Temperature="-55 to +85degC", Rated Voltage=25VDC, Ceramic Type=X5R, ComponentLink1Description=Manufacturer, ComponentLink1URL=http://www.we-online.de, ComponentLink2Description=Datasheet, ComponentLink2URL=https://www.we-online.com/catalog/datasheet/885012107017.pdf, Dissipation Factor=#NAME?, Height=1.25mm, Manufacturer Part Number=885012107017, Mounting Technology=SMT, Packaging="Tape and Reel", Published Date="May 2020", Size=0805, Technical Reference=X5R0805335M025DFCT10000
C402: library part 885012106018, "WCAP-CSGP Multilayer Ceramic Chip Capacitor, General Purpose, size 0603, X5R, 2.2uF, 16V", Capacitance=2.2uF, Capacitance Tolerance=+/-20%, Isolation Resistance=>=0.05GOhm, Manufacturer="Wurth Elektronik", Operating Temperature="-55 to +85degC", Rated Voltage=16VDC, Ceramic Type=X5R, ComponentLink1Description=Manufacturer, ComponentLink1URL=http://www.we-online.de, ComponentLink2Description=Datasheet, ComponentLink2URL=https://www.we-online.com/catalog/datasheet/885012106018.pdf, Dissipation Factor=#NAME?, Height=0.8mm, Manufacturer Part Number=885012106018, Mounting Technology=SMT, Packaging="Tape and Reel", Published Date="May 2020", Size=0603, Technical Reference=X5R0603225M016DFCT10000
C501 C505 C507 C512: library part 885012206095, "WCAP-CSGP Multilayer Ceramic Chip Capacitor, General Purpose, size 0603, X7R, 100nF, 50V", Capacitance=100nF/50V/0603, Capacitance Tolerance=+/-10%, Isolation Resistance=>=5GOhm, Manufacturer="Wurth Elektronik", Operating Temperature="-55 to +125degC", Rated Voltage=50VDC, Ceramic Type=X7R, ComponentLink1Description=Manufacturer, ComponentLink1URL=http://www.we-online.de, ComponentLink2Description=Datasheet, ComponentLink2URL=https://www.we-online.com/catalog/datasheet/885012206095.pdf, Dissipation Factor=#NAME?, Height=0.8mm, Manufacturer Part Number=885012206095, Mounting Technology=SMT, Packaging="Tape and Reel", Published Date="May 2020", Size=0603, Technical Reference=X7R0603104K050DFCT10000
C502 C510: library part 885012106018, "WCAP-CSGP Multilayer Ceramic Chip Capacitor, General Purpose, size 0603, X5R, 2.2uF, 16V", Capacitance Tolerance=+/-20%, Isolation Resistance=>=0.05GOhm, Manufacturer="Wurth Elektronik", Operating Temperature="-55 to +85degC", Rated Voltage=16VDC, Ceramic Type=X5R, ComponentLink1Description=Manufacturer, ComponentLink1URL=http://www.we-online.de, ComponentLink2Description=Datasheet, ComponentLink2URL=https://www.we-online.com/catalog/datasheet/885012106018.pdf, Dissipation Factor=#NAME?, Height=0.8mm, Manufacturer Part Number=885012106018, Mounting Technology=SMT, Packaging="Tape and Reel", Published Date="May 2020", Size=0603, Technical Reference=X5R0603225M016DFCT10000
C503: library part 885012206091, "WCAP-CSGP Multilayer Ceramic Chip Capacitor, General Purpose, size 0603, X7R, 22nF, 50V", Capacitance=22nF, Capacitance Tolerance=+/-10%, Isolation Resistance=>=10GOhm, Manufacturer="Wurth Elektronik", Operating Temperature="-55 to +125degC", Rated Voltage=50VDC, Ceramic Type=X7R, ComponentLink1Description=Manufacturer, ComponentLink1URL=http://www.we-online.de, ComponentLink2Description=Datasheet, ComponentLink2URL=https://www.we-online.com/catalog/datasheet/885012206091.pdf, Dissipation Factor=#NAME?, Height=0.8mm, Manufacturer Part Number=885012206091, Mounting Technology=SMT, Packaging="Tape and Reel", Published Date="May 2020", Size=0603, Technical Reference=X7R0603223K050DFCT10000
C504: library part 885012007092, "WCAP-CSGP Multilayer Ceramic Chip Capacitor, General Purpose, size 0805, NP0, 4.7nF, 100V", Capacitance=4.7nF/100V/0805, Capacitance Tolerance=+/-5%, Isolation Resistance=>=10GOhm, Manufacturer="Wurth Elektronik", Operating Temperature="-55 to +125degC", Rated Voltage=100VDC, Ceramic Type=NP0, ComponentLink1Description=Manufacturer, ComponentLink1URL=http://www.we-online.de, ComponentLink2Description=Datasheet, ComponentLink2URL=https://www.we-online.com/catalog/datasheet/885012007092.pdf, Dissipation Factor=Q>=1000, Height=1.25mm, Manufacturer Part Number=885012007092, Mounting Technology=SMT, Packaging="Tape and Reel", Published Date="May 2020", Size=0805, Technical Reference=NP00805472J100DFCT10000
D300 D301: "Schottky Diode", Code_JEDEC=DO-214-AA, LatestRevisionDate=17-Jul-2002, LatestRevisionNote="Re-released for DXP Platform.", PackageDescription="DO-214-AA/SMB; 2 C-Bend Leads; Body 5.3 x 3.6 mm, inc. leads (LxW)", PackageReference=SMB, Published=8-Jun-2000, Publisher="Altium Limited"
D302: library part 150060BS75000, "WL-SMCW SMT Mono-color Chip LED Waterclear, size 0603, Blue, 3.2V, 140deg", Emitting Color=Blue, Forward Voltage typ.=3.2V, Operating Temperature="-40 to +85degC", Chip Technology=InGaN, ComponentLink1Description=Manufacturer, ComponentLink1URL=http://www.we-online.de, ComponentLink2Description=Datasheet, ComponentLink2URL=https://www.we-online.com/catalog/datasheet/150060BS75000.pdf, Dominant Wavelength typ.=470nm, Luminous Intensity typ.=145mcd, Mounting Technology=SMT, Packaging="Tape and Reel", Part Number=150060BS75000, Peak Wavelength typ.=465nm, Published Date="December 2019", Publisher="Wurth Elektronik", Size=0603, Viewing Angle=140deg
D303: library part 150060RS75000, "WL-SMCW SMT Mono-color Chip LED Waterclear, size 0603, Red, 2V, 140deg", Emitting Color=Red, Forward Voltage typ.=2V, Operating Temperature="-40 to +85degC", Chip Technology=AlInGaP, ComponentLink1Description=Manufacturer, ComponentLink1URL=http://www.we-online.de, ComponentLink2Description=Datasheet, ComponentLink2URL=https://www.we-online.com/catalog/datasheet/150060RS75000.pdf, Dominant Wavelength typ.=625nm, Luminous Intensity typ.=250mcd, Mounting Technology=SMT, Packaging="Tape and Reel", Part Number=150060RS75000, Peak Wavelength typ.=630nm, Published Date="December 2019", Publisher="Wurth Elektronik", Size=0603, Viewing Angle=140deg
D500: "600W, 42.1V, 5%, Bidirectional, TVS", Package="SMB Taiwan Semiconductor", Availability="In Stock", Check_prices=https://www.snapeda.com/parts/SMBJ36CA/Taiwan+Semiconductor/view-part/?ref=eda, ComponentLink1Description=Buy, ComponentLink1URL=https://www.thegioiic.com/smbj36ca, MF="Taiwan Semiconductor", MP=SMBJ36CA, Price=None, Purchase-URL=https://pricing.snapeda.com/search/part/SMBJ36CA/?ref=eda, SnapEDA_Link=https://www.snapeda.com/parts/SMBJ36CA/Taiwan+Semiconductor/view-part/?ref=snap
D501: library part 150060BS84000, "WL-SMCW SMT Mono-color Chip LED Waterclear, size 0603 dome, Blue, 3.2V, 40deg", Emitting Color=Blue, Forward Voltage typ.=3.2V, Operating Temperature="-40 to +85degC", Chip Technology=InGaN, ComponentLink1Description=Manufacturer, ComponentLink1URL=http://www.we-online.de, ComponentLink2Description=Datasheet, ComponentLink2URL=https://www.we-online.com/catalog/datasheet/150060BS84000.pdf, Dominant Wavelength typ.=470nm, Luminous Intensity typ.=560mcd, Mounting Technology=SMT, Packaging="Tape and Reel", Part Number=150060BS84000, Peak Wavelength typ.=465nm, Published Date="December 2019", Publisher="Wurth Elektronik", Size="0603 dome", Viewing Angle=40deg
D502: library part 150060GS84000, "WL-SMCW SMT Mono-color Chip LED Waterclear, size 0603 dome, Green, 3.3V, 40deg", Emitting Color=Green, Forward Voltage typ.=3.3V, Operating Temperature="-40 to +85degC", Chip Technology=InGaN, ComponentLink1Description=Manufacturer, ComponentLink1URL=http://www.we-online.de, ComponentLink2Description=Datasheet, ComponentLink2URL=https://www.we-online.com/catalog/datasheet/150060GS84000.pdf, Dominant Wavelength typ.=525nm, Luminous Intensity typ.=3000mcd, Mounting Technology=SMT, Packaging="Tape and Reel", Part Number=150060GS84000, Peak Wavelength typ.=520nm, Published Date="December 2019", Publisher="Wurth Elektronik", Size="0603 dome", Viewing Angle=40deg
D503: library part 150060RS86000, "WL-SMCW SMT Mono-color Chip LED Waterclear, size 0603 dome, Red, 2V, 60deg", Emitting Color=Red, Forward Voltage typ.=2V, Operating Temperature="-40 to +85degC", Chip Technology=AlInGaP, ComponentLink1Description=Manufacturer, ComponentLink1URL=http://www.we-online.de, ComponentLink2Description=Datasheet, ComponentLink2URL=https://www.we-online.com/catalog/datasheet/150060RS86000.pdf, Dominant Wavelength typ.=624nm, Luminous Intensity typ.=800mcd, Mounting Technology=SMT, Packaging="Tape and Reel", Part Number=150060RS86000, Peak Wavelength typ.=632nm, Published Date="December 2019", Publisher="Wurth Elektronik", Size="0603 dome", Viewing Angle=60deg
F300: "Polymeric PTC Resettable Fuse 6V 350mA Ih Surface Mount 1206 _3216 Metric_, Concave", Package="1206 Littelfuse", Availability=Unavailable, MF="Littelfuse Inc.", MP=1206L035YR, Price=None, SnapEDA_Link=https://www.snapeda.com/parts/1206L035YR/Littelfuse%20Inc./view-part/225191/?ref=snap
H400 H401 H402 H403: "Hole 3mm"
J400: "Jack 3.5 3-Pole 5-Pin", ComponentLink1Description=Buy, ComponentLink1URL=https://www.thegioiic.com/pj-324-cong-audio-3-5mm-3-cuc-5-chan-han-pcb
L300: library part 784773047, "WE-PD2A SMT Power Inductor, size 4532, 4.7uH, 1.82A", DC Resistance max.=0.11Ohm, DC Resistance typ.=0.059Ohm, Manufacturer="Wurth Elektronik", Operating Temperature="-40 to +125degC", Rated Current=1.82A, Rated Voltage=80VDC, Saturation Current=2.46A, Self Resonant Frequency=45MHz, ComponentLink1Description=Manufacturer, ComponentLink1URL=http://www.we-online.de, ComponentLink2Description=Datasheet, ComponentLink2URL=https://www.we-online.com/catalog/datasheet/784773047.pdf, Manufacturer Part Number=784773047, Mounting Technology=SMT, Packaging="Tape and Reel", Published Date="May 2020", Size=4532
L301: library part 78477310, "WE-PD2A SMT Power Inductor, size 4532, 10uH, 1.45A", DC Resistance max.=0.182Ohm, DC Resistance typ.=0.118Ohm, Inductance=10uH, Manufacturer="Wurth Elektronik", Operating Temperature="-40 to +125degC", Rated Current=1.45A, Rated Voltage=80VDC, Saturation Current=1.74A, Self Resonant Frequency=30MHz, ComponentLink1Description=Manufacturer, ComponentLink1URL=http://www.we-online.de, ComponentLink2Description=Datasheet, ComponentLink2URL=https://www.we-online.com/catalog/datasheet/78477310.pdf, Manufacturer Part Number=78477310, Mounting Technology=SMT, Packaging="Tape and Reel", Published Date="May 2020", Size=4532
M500 M501 M502: "N-Channel 20 V 2.6A (Ta) 710mW (Ta) Surface Mount SOT-23-3 (TO-236)", Package="SOT-23-3 Vishay Siliconix", Availability="In Stock", Check_prices=https://www.snapeda.com/parts/SI2302/Vishay+Siliconix/view-part/?ref=eda, ComponentLink1Description=Buy, ComponentLink1URL=https://www.thegioiic.com/si2302ds-mosfet-kenh-n-20v-2-5a-sot23, MF="Vishay Siliconix", MP=SI2302, Price=None, Purchase-URL=https://pricing.snapeda.com/search/part/SI2302/?ref=eda, SnapEDA_Link=https://www.snapeda.com/parts/SI2302/Vishay+Siliconix/view-part/?ref=snap
P500: "WR-PHD Pin Header, THT, pitch 2.54mm, Single Row, Vertical, 8p", Contact Resistance=20mOhm, Manufacturer="Wurth Elektronik", Operating Temperature="-40 to +105degC", Rated Current=3A, Withstanding Voltage=500VAC, Working Voltage=250VAC, ComponentLink1Description=Manufacturer, ComponentLink1URL=http://www.we-online.de, ComponentLink2Description=Datasheet, ComponentLink2URL=https://www.we-online.com/catalog/datasheet/61300811121.pdf, Gender="Pin Header", Manufacturer Part Number=61300811121, Mounting Technology=THT, Orientation=Vertical, Packaging=Bag, Pin Number=8, Pitch=2.54mm, Published Date="May 2020", Row Number=Single
P501: "WR-PHD Pin Header, THT, pitch 2.54mm, Single Row, Vertical, 9p", Contact Resistance=20mOhm, Manufacturer="Wurth Elektronik", Operating Temperature="-40 to +105degC", Rated Current=3A, Withstanding Voltage=500VAC, Working Voltage=250VAC, ComponentLink1Description=Manufacturer, ComponentLink1URL=http://www.we-online.de, ComponentLink2Description=Datasheet, ComponentLink2URL=https://www.we-online.com/catalog/datasheet/61300911121.pdf, Gender="Pin Header", Manufacturer Part Number=61300911121, Mounting Technology=THT, Orientation=Vertical, Packaging=Bag, Pin Number=9, Pitch=2.54mm, Published Date="May 2020", Row Number=Single
P502 P503 P504: "WR-PHD Pin Header, THT, pitch 2.54mm, Single Row, Vertical, 4p", Contact Resistance=20mOhm, Manufacturer="Wurth Elektronik", Operating Temperature="-40 to +105degC", Rated Current=3A, Withstanding Voltage=500VAC, Working Voltage=250VAC, ComponentLink1Description=Manufacturer, ComponentLink1URL=http://www.we-online.de, ComponentLink2Description=Datasheet, ComponentLink2URL=https://www.we-online.com/catalog/datasheet/61300411121.pdf, Gender="Pin Header", Manufacturer Part Number=61300411121, Mounting Technology=THT, Orientation=Vertical, Packaging=Bag, Pin Number=4, Pitch=2.54mm, Published Date="May 2020", Row Number=Single
R300: "Code (4422, 63C), 1/10W 1%", ComponentLink1Description=Buy, ComponentLink1URL=https://www.thegioiic.com/dien-tro-44-2-kohm-0603-1-
R301: "Code (2321, 36B), 1/10W", ComponentLink1Description=Buy, ComponentLink1URL=https://www.thegioiic.com/dien-tro-2-7-kohm-0603-5-
R302: "Code 471, 1/10W", ComponentLink1Description=Buy, ComponentLink1URL=https://www.thegioiic.com/dien-tro-470-ohm-0603-1-
R303 R402 R403 R505 R506 R507: "Code 102, 1/10W", ComponentLink1Description=Buy, ComponentLink1URL=https://www.thegioiic.com/dien-tro-1-kohm-0603-1
R304 R501 R502 R503 R504: "Code 104, 1/10W", ComponentLink1Description=Buy, ComponentLink1URL=https://www.thegioiic.com/dien-tro-100-kohm-0603-1-
R305: "Code 153, 1/10W", ComponentLink1Description=Buy, ComponentLink1URL=https://www.thegioiic.com/dien-tro-15-kohm-0603-1-
R306: "Code 2003, 1/10W", ComponentLink1Description=Buy, ComponentLink1URL=https://www.thegioiic.com/dien-tro-200-kohm-0603-1-
R307 R308 R309: "Code 0R, 1/10W", ComponentLink1Description=Buy, ComponentLink1URL=https://www.thegioiic.com/dien-tro-0-ohm-0603-5-
R400 R401 R404 R405: "Code 475, 1/8W", ComponentLink1Description=Buy, ComponentLink1URL=https://www.thegioiic.com/dien-tro-4-7-mohm-0805-5-
R406: "Code 754, 1/10W"
R408: "Code 304, 1/10W"
R409 R410 R411 R508 R509 R510: "Code 103, 1/10W", ComponentLink1Description=Buy, ComponentLink1URL=https://www.thegioiic.com/dien-tro-10-kohm-0603-1-
R412: "Code 105, 1/10W", ComponentLink1Description=Buy, ComponentLink1URL=https://www.thegioiic.com/dien-tro-1-mohm-0603-1-
R500: "Code 272, 1/10W", ComponentLink1Description=Buy, ComponentLink1URL=https://www.thegioiic.com/dien-tro-2-7-kohm-0603-5-
U300: "High Efficiency 1.2MHz 2A Step Up Converter", Package="- Semtech Corporation", Availability="In Stock", Check_prices=https://www.snapeda.com/parts/SX1308/Semtech+Corporation/view-part/?ref=eda, MF="Semtech Corporation", MP=SX1308, Price=None, Purchase-URL=https://pricing.snapeda.com/search/part/SX1308/?ref=eda, SnapEDA_Link=https://www.snapeda.com/parts/SX1308/Semtech+Corporation/view-part/?ref=snap
U301: "IC REG LINEAR 5V 100MA SOT89-3", Package=None, Availability="Not in stock", Check_prices=https://www.snapeda.com/parts/78L05/Hottech+Semiconductor/view-part/?ref=eda, MF="Hottech Co", MP=78L05, Price=None, SnapEDA_Link=https://www.snapeda.com/parts/78L05/Hottech+Semiconductor/view-part/?ref=snap
U302: "CMOS, Voltage Converters", Package="SOIC-8 Maxim", Availability="In Stock", Check_prices=https://www.snapeda.com/parts/ICL7662EBA+/Analog+Devices/view-part/?ref=eda, ComponentLink1Description=Buy, ComponentLink1URL=https://www.thegioiic.com/icl7662cba, MF="Analog Devices", MP=ICL7662EBA+, Price=None, Purchase-URL=https://pricing.snapeda.com/search/part/ICL7662EBA+/?ref=eda, SnapEDA_Link=https://www.snapeda.com/parts/ICL7662EBA+/Analog+Devices/view-part/?ref=snap
U303: "2A, 4.5 - 18V Input, 500kHz Synchronous Step-Down Converter", ComponentLink1Description=Buy, ComponentLink1URL=https://www.thegioiic.com/mt1470-ic-dieu-chinh-giam-ap-2a-sot-23-6
U400: "Precision, Low Power Instrumentation Amplifiers", ComponentLink1Description=Buy, ComponentLink2Description=Datasheet, ComponentLink2URL=https://www.ti.com/lit/ds/symlink/ina129-ep.pdf?ts=1697381225295&ref_url=https%253A%252F%252Fwww.google.com%252F
U401 U402: "High-Precision, Low-Noise Operational Amplifiers", ComponentLink1Description=Datasheet, ComponentLink1URL=https://www.ti.com/lit/ds/symlink/opa2227.pdf?ts=1697381749451&ref_url=https%253A%252F%252Fwww.ti.com%252Fproduct%252FOPA2227
U500: "Single-Channel, Software Configurable Input and Output", Manufacturer_Name="Analog Devices", Mouser Part Number=584-AD74115BCPZ, Datasheet Link=https://www.analog.com/AD74115/datasheet, Geometry.Height=0.8mm, Manufacturer_Part_Number=AD74115BCPZ, Mouser Price/Stock=https://www.mouser.co.uk/ProductDetail/Analog-Devices/AD74115BCPZ?qs=Jm2GQyTW%2FbiQ8agDBTeo0A%3D%3D
VR400: library part "Var Resistor", "Var Resistor"

## Via types
v1: diameter 23.62, hole 11.81, Signal+GND to GND, 116 vias

## Nets (pads, with @x,y where several pads share a name; then routed paths per layer and width w, separated by ;. In a path a pad name is that pad's centre, name@x,y a point inside that pad or via, vN(x,y) a via of type N, cw(c..) or ccw(c..) an arc to the next point about the centre after c; other vN are vias at no path point)
+5: C405.2 C408.1 C409.2 C500.2 C501.2 C511.2 C512.2 D302.2 D501.2 D502.2 D503.2 R308.2 R501.2 R502.2 R503.2 R504.1 U400.7 U401.8 U402.8 U500.14 U500.47 | length 5609
  Signal+GND w10: v1(240,690) 242.02,687.98 C409.2@294.71,687.98 294.24,688.45 U402.8@294.24,756.95 ; v1(695,1385) 696.83,1383.17 C405.2@696.83,1344.16 696.83,1248.17 719.8,1225.2 U400.7@815.24,1225.2 ; v1(815,765) 815,704.97 815.24,704.72 U401.8@815.24,635.2 ; D501.2@1017.71,1010 D502.2@1017.71,1120 D503.2@1017.71,1233.16 1018.85,1234.31 1018.85,1278.85 v1(1020,1280) ; C511.2@1152.92,1049.53 C512.2@1216.08,1049.53 1299.71,1049.53 1320.66,1028.58 U500.14@1348.44,1028.58 ; v1(1154.24,1370) 1155.96,1371.72 1208,1371.72 R504.1@1210.5,1374.22 ; R503.2@1619.99,1373.44 R502.2@1687.11,1373.44 1715.8,1373.44 ; U500.47@1620.1,1028.58 1727.82,1028.58 1747.4,1048.16 C501.2@1747.4,1090.47 C500.2@1810.56,1090.47 1809.24,1089.15 v1(1809.24,1045) ; R501.2@1754.24,1373.44 1715.8,1373.44 ; v1(1824.24,1370) 1822.52,1371.72 1755.96,1371.72 1754.24,1370 1750.8,1373.44 1715.8,1373.44 ; D302.2@1980.87,860.77 D302.2@1995.02,860.77 ; D302.2@1995.02,862.73 2024.24,862.73 ; v1(2024.24,890) 2024.24,862.73 ; R308.2@2067.75,862.73 2024.24,862.73
  Signal+GND w14.88: C511.2@1152.92,1049.53 1153.58,1050.19 1153.58,1084.34 v1(1154.24,1085)
  PWR w10.57: v1(240,690) 240,1240 385,1385 v1(695,1385) 710,1370 815.24,1370 ; v1(815,765) 815,1070.39 815.24,1070.64 815.24,1370 ; v1(1020,1280) 1020,1370 ; v1(1154.24,1085) v1(1154.24,1370) ; v1(1809.24,1045) 1919.24,1045 ; v1(2024.24,890) 2020.79,890 1919.24,991.55 1919.24,1045 ; 815.24,1370 1020,1370 ; 1020,1370 v1(1154.24,1370) ; v1(1154.24,1370) v1(1824.24,1370) 1854.24,1370 1919.24,1305 1919.24,1045
+5OUT: C303.1 R308.1 U301.1 | length 572.7
  Signal+GND w10: R308.1@2126.8,862.73 2196.97,862.73 v1(2239.24,905) ; v1(2239.24,770) 2289.23,770 2290.81,771.57 U301.1@2546.29,771.57
  PWR w10.57: v1(2239.24,770) v1(2239.24,905)
+6: C307.1 C309.2 C310.2 L301.2 U302.8 | length 332.1
  Signal+GND w10: U302.8@2310.22,1225.63 2310.22,1259.03 2296.65,1272.59 C307.1@2296.65,1306.1 2300.55,1310 2484.24,1310 2490.87,1316.62 L301.2@2538.3,1316.62
+12: C505.2 C506.2 D303.2 R307.2 U500.25 | length 1669.9
  Signal+GND w10: v1(1149.24,735) 1188.77,735 C506.2@1189.24,735.47 C505.2@1252.4,735.47 1321.1,804.17 U500.25@1376,804.17 ; D303.2@1980.87,795 1981.5,795.63 2024.24,795.63 ; v1(2024.24,745) 2024.24,795.63 ; R307.2@2067.75,795.63 2024.24,795.63
  PWR w10.57: v1(1149.24,735) 1149.24,588.56 1237.8,500 1979.24,500 2024.24,545 v1(2024.24,745)
+12OUT: C301.2 D300.2 R300.2 R307.1 | length 311.4
  Signal+GND w10: R307.1@2126.8,795.63 2126.8,702.06 2126.84,702.02 2125.66,700.84 D300.2@2125.66,590.63 2127.75,588.54 R300.2@2127.75,485.63
-5: C406.1 C407.2 C410.1 R309.2 U400.4 U401.4 U402.4 | length 3279.7
  Signal+GND w10: v1(475,1025) 503.77,1025 ; C410.1@503.77,975.92 503.77,1025 ; U401.4@605.24,485.2 605.24,416.7 C407.2@605.72,416.23 ; U400.4@605.24,1125.2 605.24,1059.2 C406.1@604.24,1058.2 536.97,1058.2 503.77,1025 ; v1(2029.24,930) 2067.57,930 R309.2@2067.75,929.82
  Signal+GND w10.57: C410.1@503.77,975.92 503.77,907.42 U402.4@504.24,906.95 ; v1(605,370) 605.36,370.36 605.36,415.87 C407.2@605.72,416.23
  PWR w10.57: v1(475,1025) 475,500 645,330 2017.68,330 2094.24,406.56 2094.24,865 v1(2029.24,930)